# Altium PCB new_pir.PcbDoc
Units mm, origin at the board's own origin, x right, y up, seen from the top; angles counter-clockwise.
Board outline 122.94 x 94.36 mm, 2 copper layers (Top Layer, Bottom Layer); 60 components, 38 nets, 198 pads, 34 vias.
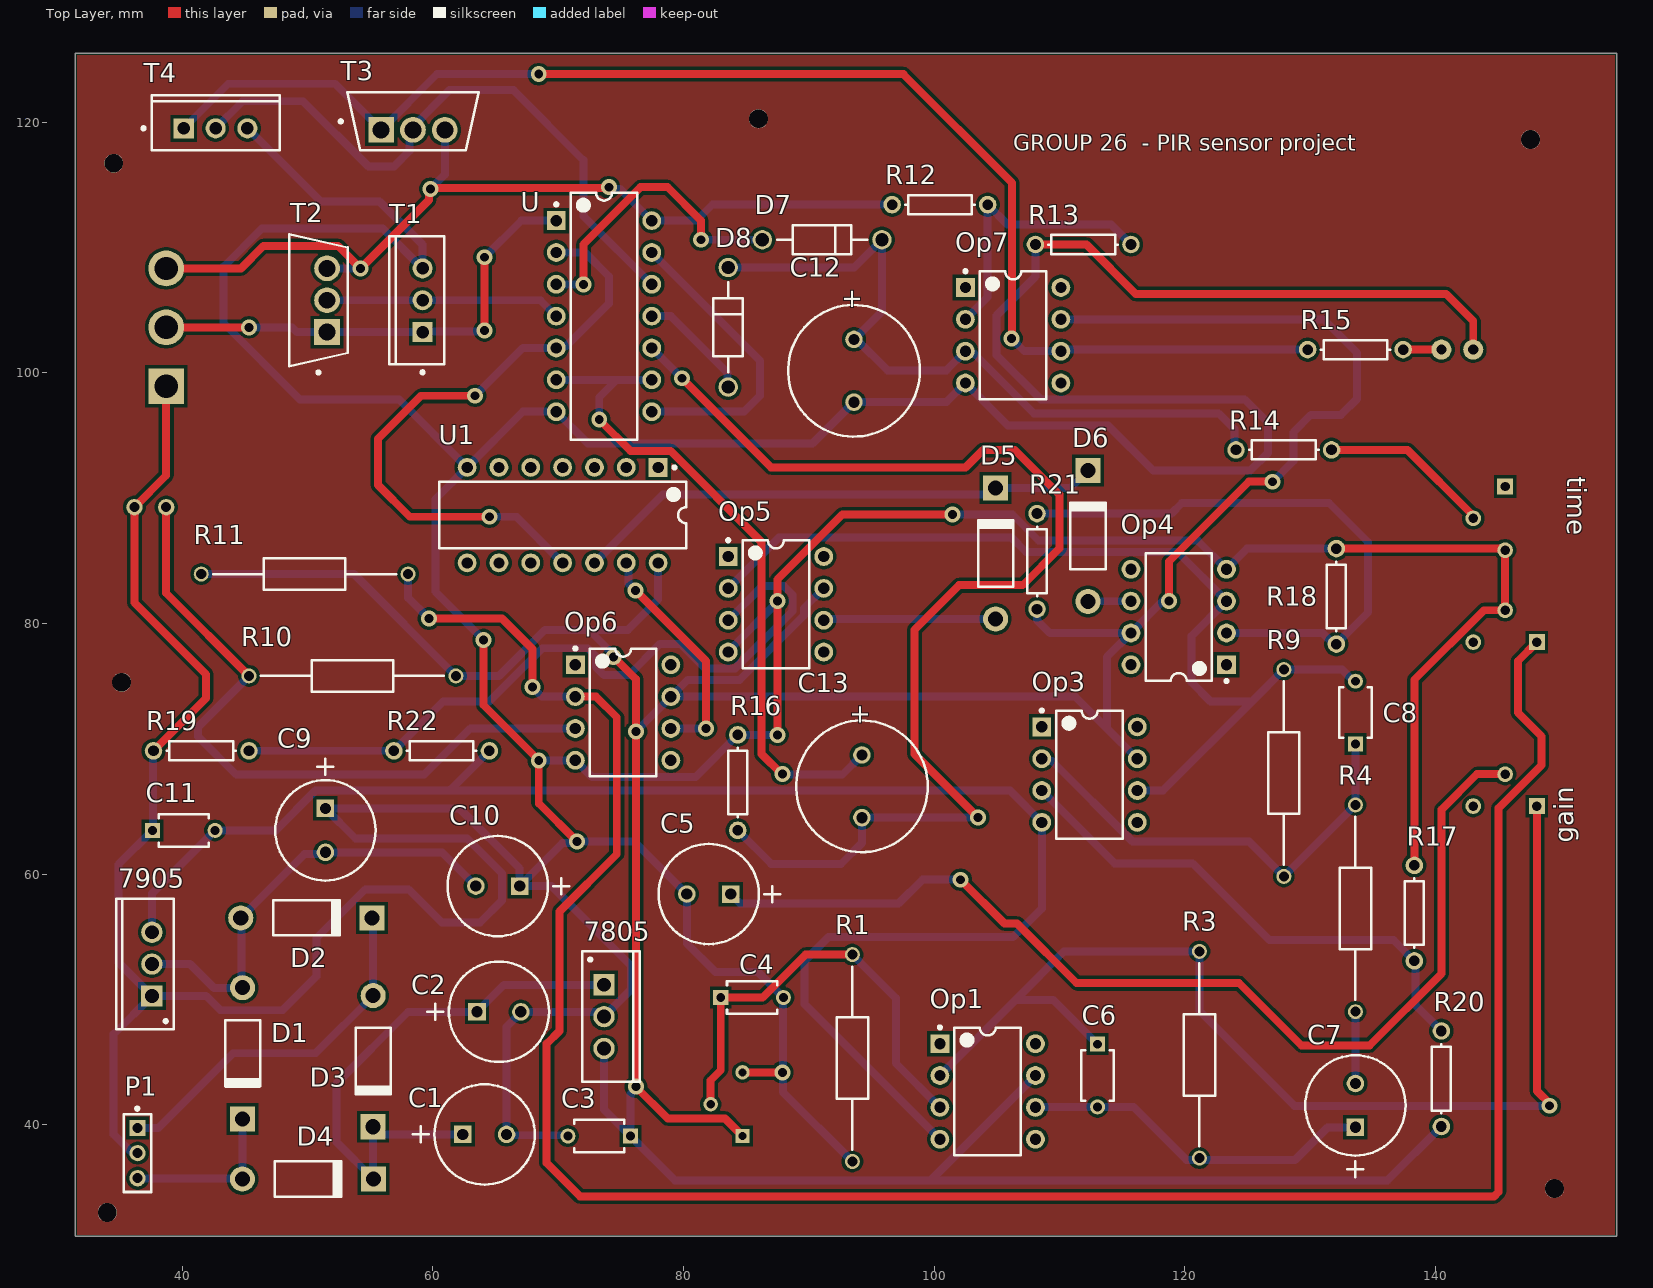
[diagram p0: Top Layer view]
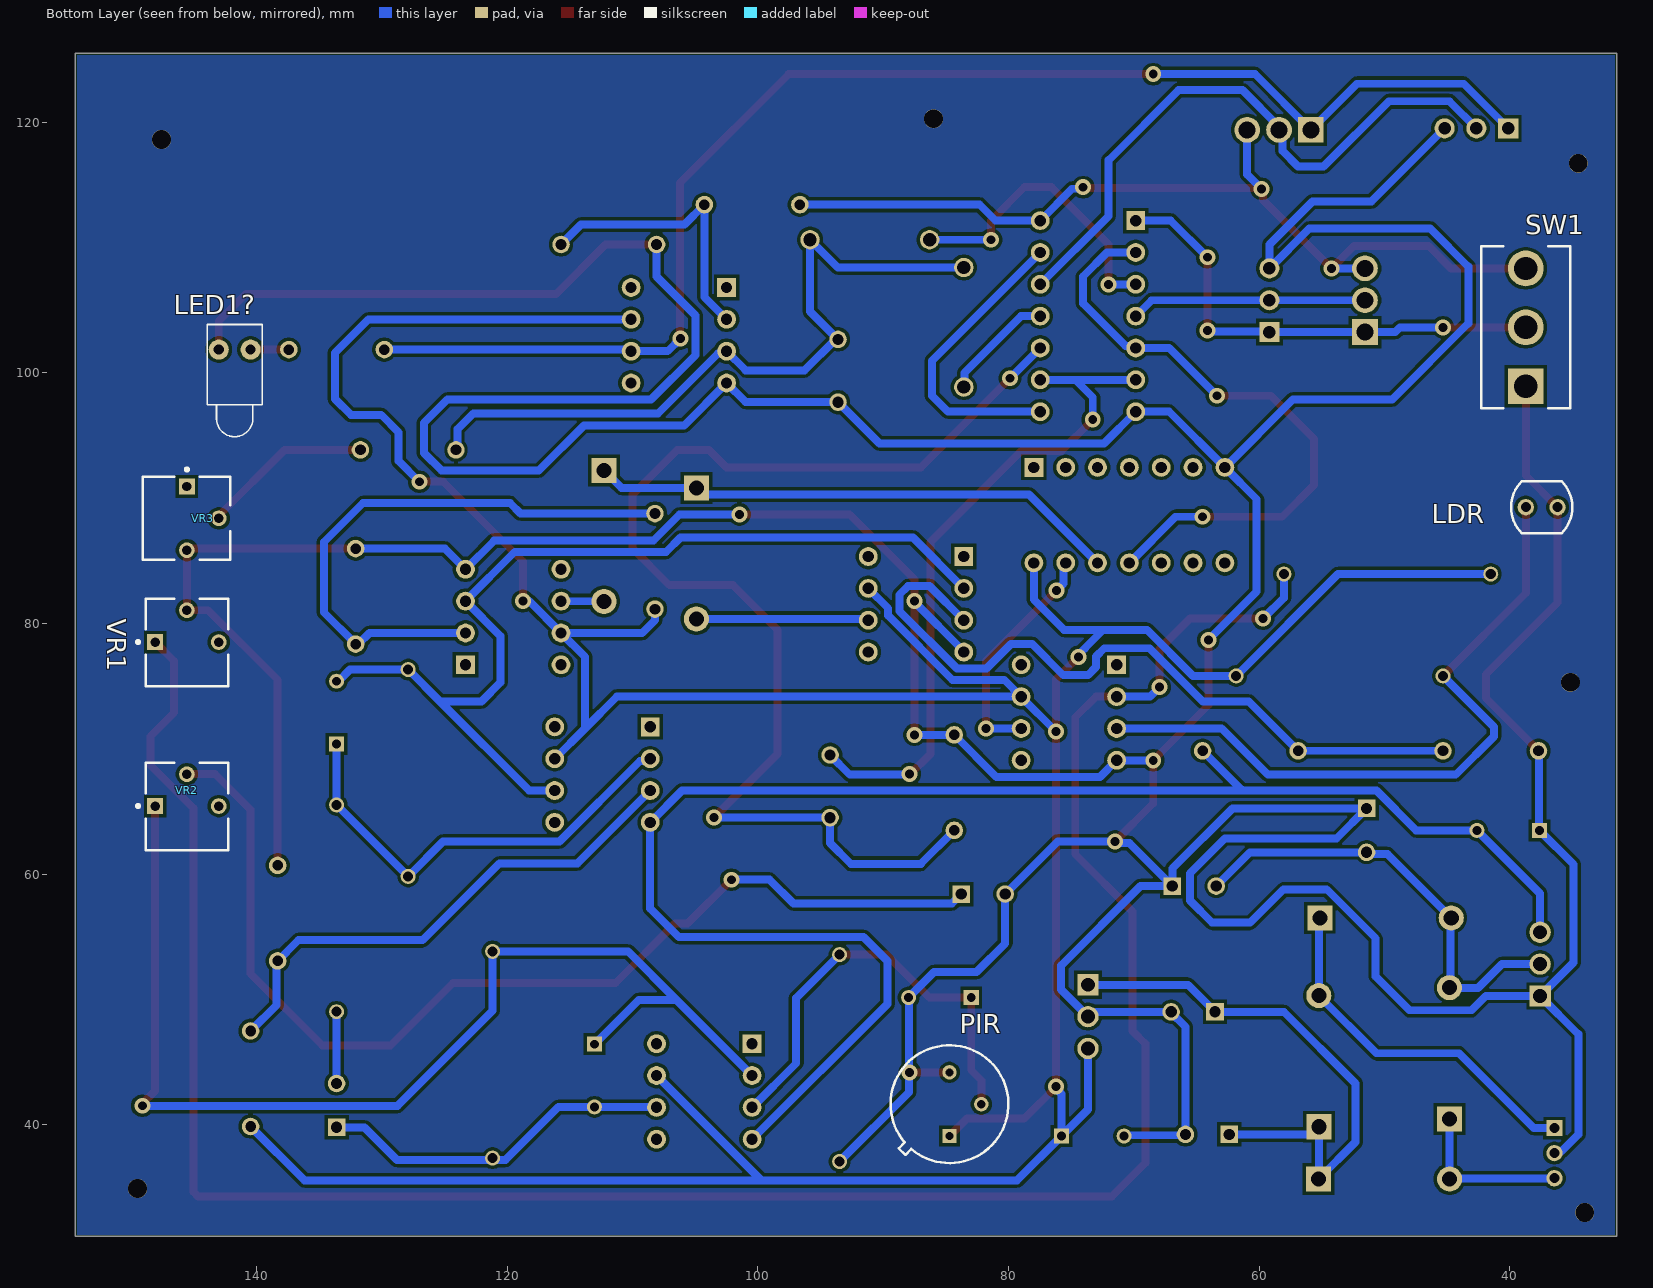
[diagram p1: Bottom Layer view, seen from below]

## Layer stack, top to bottom
Top Solder: solder mask 0.0102, Solder Resist, Dk 3.5
Top Layer: signal copper 0.0356
Dielectric 1: dielectric 0.32, FR-4, Dk 4.8
Bottom Layer: signal copper 0.0356
Bottom Solder: solder mask 0.0102, Solder Resist, Dk 3.5

## Board outline
31.496,31.115 154.432,31.115 154.432,125.476 31.496,125.476

## Design rules (kind name [scope] priority, off if disabled: settings)
Clearance [All] p1: gap=0.254 ignorepadtopadclearanceinfootprint=TRUE except(0: Arc-Hole Track-Hole SMDPad-Hole THPad-Hole Via-Hole Fill-Hole Poly-Hole Region-Hole Text-Hole)
PolygonConnect [All] p1: connectstyle=Relief reliefconductorwidth=0.254 reliefentries=4 polygonreliefangle="90 Angle" airgapwidth=0.254
RoutingVias [All] p1: holewidth=0.711 width=1.27 viastyle="Through Hole" minholewidth=0.711 minwidth=1.27 maxholewidth=0.711 maxwidth=1.27
SolderMaskExpansion [All] p1: expansion=0.102 istentingtop=FALSE
Width [All] p1: maxlimit=0.635 minlimit=0.254 preferedwidth=0.635 minimp=50.000000 maximp=50.000000 favimp=50.000000
30 further rules are at their usual default settings.

## Components (designator, comment, footprint, x,y, rotation, side; value= is the part's Value field where it differs from the comment)
7805 "L7805CV" TO220 73.66,48.641 r270 top
7905 "L7905CV" TO-220 37.592,52.832 r90 top
C1 "470uF 16V" CAPPR65-350-1150X800X1250 64.135,39.243 r0 top
C2 "330nF 16V" CAPPR65-350-1150X800X1250 65.278,49.022 r0 top
C3 "100nF" FP-K15H5-MFG 73.279,39.116 r180 top
C4 "100nF" FP-K15H5-MFG 85.471,50.165 r0 top
C5 "47uF 16V" CAPPR65-350-1150X800X1250 82.014,58.42 r180 top
C6 "10nF" FP-K15H5-MFG 113.03,43.942 r270 top
C7 "10uF 16V" CAPPR65-350-1150X800X1250 133.604,41.557 r90 top
C8 "10nF" FP-K15H5-MFG 133.604,72.898 r90 top
C9 "470uF 16V" CAPPR65-350-1150X800X1250 51.435,63.5 r270 top
C10 "330nF 16V" CAPPR65-350-1150X800X1250 65.179,59.055 r180 top
C11 "100nF" FP-K15H5-MFG 40.132,63.5 r0 top
C12 "ECA-1HHG471" PNSC-CAP-10x20-P2 93.599,100.163 r270 top
C13 "ECA-1HHG471" PNSC-CAP-10x20-P2 94.234,67.016 r270 top
D1 "Diode 1N4004" DO-41 44.831,45.72 r270 top
D2 "Diode 1N4004" DO-41 49.911,56.515 r0 top
D3 "Diode 1N4004" DO-41 55.245,45.085 r270 top
D4 "Diode 1N4004" DO-41 50.038,35.687 r0 top
D5 "Diode 1N4004" DO-41 104.902,85.598 r90 top
D6 "Diode 1N4004" DO-41 112.268,86.995 r90 top
D7 "1N4004" ONSC-AXIAL_LEAD-2-59-10_P 91.059,110.617 r180 top
D8 "1N4004" ONSC-AXIAL_LEAD-2-59-10_P 83.566,103.632 r270 top
LDR "VT90N1" EXCE-VT90N1 37.465,89.281 r0 bottom
LED1? "LED1" LED-1 141.732,101.854 r270 bottom
Op1 "LM741" P0008A 104.267,42.672 r0 top
Op3 "LM741" P0008A 112.395,67.945 r0 top
Op4 "LM741" P0008A 119.507,80.518 r180 top
Op5 "LM741" P0008A 87.376,81.534 r0 top
Op6 "LM741" P0008A 75.184,72.898 r0 top
Op7 "LM741" P0008A 106.299,102.997 r0 top
P1 "951103-8622-AR" FP-951103-8622-AR-MFG 36.449,37.751 r270 top
PIR "IRA-S210ST01" FP-IRA-S210ST01-MFG 84.709,41.656 r0 bottom
R1 "47kΩ" RESAD1650W60L650D250 93.472,53.584 r270 top
R3 "2MΩ" RESAD1650W60L650D250 121.158,53.848 r270 top
R4 "10kΩ" RESAD1650W60L650D250 133.604,49.032 r90 top
R9 "1MΩ" RESAD1650W60L650D250 127.889,59.827 r90 top
R10 "10kΩ" RESAD1650W60L650D250 45.339,75.819 r0 top
R11 "5kΩ" RESAD1650W60L650D250 58.029,83.947 r180 top
R12 "47kΩ" AXIAL-0.3 100.457,113.411 r0 top
R13 "47kΩ" AXIAL-0.3 111.887,110.236 r180 top
R14 "Res1" AXIAL-0.3 127.889,93.853 r180 top
R15 "Res1" AXIAL-0.3 133.604,101.854 r0 top
R16 "Res1" AXIAL-0.3 84.328,67.31 r90 top
R17 "47kΩ" AXIAL-0.3 138.303,56.896 r270 top
R18 "47kΩ" AXIAL-0.3 132.08,82.169 r270 top
R19 "47kΩ" AXIAL-0.3 41.529,69.85 r0 top
R20 "47kΩ" AXIAL-0.3 140.462,43.688 r270 top
R21 "47kΩ" AXIAL-0.3 108.204,84.963 r270 top
R22 "47kΩ" AXIAL-0.3 60.706,69.85 r0 top
SW1 "A101SYCB04" FP-A101SYCB04-MFG 38.735,103.632 r0 bottom
T1 "SPP21N50C3" INF-PG-TO220-3-1 59.182,105.791 r180 top
T2 "IRF9530PBF" FP-X15-0364-MFG 50.877,105.791 r180 top
T3 "IRF9530PBF" FP-X15-0364-MFG 58.42,120.065 r90 top
T4 "SPP21N50C3" INF-PG-TO220-3-1 42.672,119.507 r90 top
U "SN74AHCT08N" N0014A 73.66,104.521 r0 top
U1 "SN74AHCT08N" N0014A 70.358,88.646 r270 top
VR1 "3362P-1-103LF" BOUR-3362P 145.542,78.486 r180 bottom
VR2 "3362P-1-103LF" BOUR-3362P 145.542,65.405 r180 bottom
VR3 "3362P-1-103LF" BOUR-3362P 145.577,88.392 r270 bottom

## Footprints (in the part's own frame and the unit in brackets; to place one, negate y for a bottom-side part, rotate by r counter-clockwise, add the part's x,y. Pads: shape width x height; smd on the part's side, far side on the other; paste and mask are expansions set on the pad)
AXIAL-0.3 [mm] "Axial Device, Thru-Hole; 2 Leads; 0.3 in Pin Spacing"
  round 1.4 hole 0.85: 1(-3.81,0) 2(3.81,0)
  silkscreen extent -2.77,-0.76 2.77,0.76
BOUR-3362P [mm] "THD, 3-Leads, Body 6.6x6.99mm, Pitch 2.54mm"
  rect 1.25x1.25 hole 0.75: 1(-2.54,0.035)
  round 1.25 hole 0.75: 2(0,2.575) 3(2.54,0.035)
  silkscreen extent -4.03,-3.49 3.3,3.5, body extent -3.3,-3.49 3.3,3.49, height 4.95
CAPPR65-350-1150X800X1250 [mm] "THD, 2-Leads, Dia 8mm, Body 11.5mm"
  rect 1.4x1.4 hole 0.9: 1(-1.75,0)
  round 1.4 hole 0.9: 2(1.75,0)
  silkscreen extent -5.72,-4 4,4
DO-41 [mm] "Diode, Axial; Body 5.2 x 2.7 mm (LxDia. max), Lead Dia. 0.86 mm (max)"
  round 2 hole 1.2: 1(-5.23,0)
  rect 2x2 hole 1.2: 2(5.23,0)
  silkscreen extent -2.65,-1.4 2.75,1.4
EXCE-VT90N1 [mm] "THD, 2-Leads, Body Width 4.17mm (Max), Height 2.29mm"
  round 1.3 hole 0.8: 1(-1.27,0) 2(1.27,0)
  silkscreen extent -2.44,-2.08 2.44,2.08
FP-951103-8622-AR-MFG [mm]
  rect 1.3x1.3 hole 0.8 paste-1000 mask+0: 1(-2,0)
  round 1.3 hole 0.8 paste-1000 mask+0: 2(0,0) 3(2,0)
  silkscreen extent -3.67,-1.1 3.1,1.1, body extent -3.2,-1.2 3.2,1.2, height 0.25
FP-A101SYCB04-MFG [mil]
  rect 112.37x112.37 hole 73 paste-39370.1 mask+0: 1(0,185)
  round 112.37 hole 73 paste-39370.1 mask+0: 2(0,0) 3(0,-185)
  silkscreen extent -140,-255 140,255, body extent -135,-250 135,250, height 1201
FP-IRA-S210ST01-MFG [mm]
  rect 1.15x1.15 hole 0.65 paste-1000 mask+0: 1(0,2.54)
  round 1.15 hole 0.65 paste-1000 mask+0: 2(-2.54,0) 3(0,-2.54)
  silkscreen extent -4.7,-4.7 4.7,4.7, body extent -4.6,-4.6 4.6,4.6, height 4.9
FP-K15H5-MFG [mm]
  rect 1.2x1.2 hole 0.7 paste-1000 mask+0: 1(-2.5,0)
  round 1.2 hole 0.7 paste-1000 mask+0: 2(2.5,0)
  silkscreen extent -2,-1.3 2,1.3, body extent -3.2,-1.4 3.2,1.4, height 0.25
FP-X15-0364-MFG [mm]
  rect 2.05x2.05 hole 1.35 paste-1000 mask+0: 1(-0.685,2.54)
  round 2.05 hole 1.35 paste-1000 mask+0: 2(-0.685,0) 3(-0.685,-2.54)
  silkscreen extent -2.33,-5.26 2.33,5.88, body extent -2.42,-5.36 2.42,5.36, height 0.25
INF-PG-TO220-3-1 [mm] "FM, 3-Leads, Body 10x4.4mm, Pitch 2.54mm"
  rect 1.6x1.6 hole 1: 1(0,2.54)
  round 1.6 hole 1: 2(0,0) 3(0,-2.54)
  silkscreen extent -1.75,-5.1 2.65,5.87, body extent -1.75,-5.1 2.65,5.1, height 20.7
LED-1 [mm] "LED; 2 Leads"
  round 1.6 hole 0.8: 1(0,1.27) 2(0,-1.27)
  silkscreen extent -2,-2.2 6.95,2.2
N0014A [mm] "DIP, 14-Leads, Body 19.7x6.6mm, Pitch 2.54mm"
  rect 1.5x1.5 hole 0.9: 1(-3.81,7.62)
  round 1.5 hole 0.9: 2(-3.81,5.08) 3(-3.81,2.54) 4(-3.81,0) 5(-3.81,-2.54) 6(-3.81,-5.08) 7(-3.81,-7.62) 8(3.81,-7.62) 9(3.81,-5.08) 10(3.81,-2.54) 11(3.81,0) 12(3.81,2.54) 13(3.81,5.08) 14(3.81,7.62)
  silkscreen extent -3.93,-9.85 2.65,9.85, body extent -3.95,-9.85 3.95,9.85, height 5.08
ONSC-AXIAL_LEAD-2-59-10_P [mm] "AXIAL, 2-Leads, Diameter 2.35mm"
  round 1.55 hole 1.05: 1(-4.77,0) 2(4.77,0)
  silkscreen extent -3.6,-1.18 3.6,1.18
P0008A [mm] "DIP, 8-Leads, Body 10.15x6.6mm, Pitch 2.54mm"
  rect 1.5x1.5 hole 0.9: 1(-3.81,3.81)
  round 1.5 hole 0.9: 2(-3.81,1.27) 3(-3.81,-1.27) 4(-3.81,-3.81) 5(3.81,-3.81) 6(3.81,-1.27) 7(3.81,1.27) 8(3.81,3.81)
  silkscreen extent -3.93,-5.1 2.65,5.23, body extent -3.95,-5.07 3.95,5.07, height 5.08
PNSC-CAP-10x20-P2 [mm] "THD, 2-Leads, Dia 10.5mm, Body Length 22mm, Pin Spacing 5mm"
  round 1.4 hole 0.9: 1(-2.5,0) 2(2.5,0)
  silkscreen extent -5.25,-5.25 5.25,5.25, body extent -2.82,-0.32 2.83,0.32
RESAD1650W60L650D250 [mm]
  round 1.2 hole 0.8: 1(0,0) 2(16.5,0)
  silkscreen extent 0.95,-1.25 15.55,1.25, body extent -0.3,-1.25 16.8,1.25, height 2.49
TO220 [mm] "TO, Thru-Hole, Vertical, Heatsink Mounted; 3 In-Line Leads; Pitch 2.54 mm"
  rect 1.7x1.7 hole 1.1: 1(-2.54,0)
  round 1.7 hole 1.1: 2(0,0) 3(2.54,0)
  silkscreen extent -5.2,-1.75 5.2,2.85, body extent -5.25,-1.8 5.25,2.9, height 19.7
TO-220 [mm] "TO, Thru-Hole, Vertical, Heatsink Mounted; 3 In-Line Leads; Pitch 2.54 mm"
  rect 1.7x1.7 hole 1.1: 1(-2.54,0)
  round 1.7 hole 1.1: 2(0,0) 3(2.54,0)
  silkscreen extent -5.2,-1.75 5.2,2.85, body extent -5.25,-1.8 5.25,2.9, height 19.7

## Part data
7805: library part CMP-0244-00483-1, "Positive Voltage Regulator, 5V, 3-Pin TO-220"
7905: library part CMP-0244-00447-1, "Negative Voltage Regulator, -5V, 3-Pin TO-220"
C1 C2 C5 C7 C9 C10: library part CMP-1665-00042-2, "Aluminum Electrolytic Capacitor, 100 uF, +/- 20%, 50 V, -40 to 85 degC, 2-Pin THD, RoHS, Bulk"
C3 C4 C6 C8 C11: library part CMP-02417-000048-1, "CAP CER 0.1UF 50V X7R RADIAL"
C12 C13: library part CMP-2000-05308-1, "Aluminum Electrolytic Capacitor, 470 uF, +/- 20%, 50 V, -55 to 105 degC, 2-Pin THD, RoHS, Bulk"
D1 D2 D3 D4 D5 D6: "1 Amp General Purpose Rectifier"
D7 D8: library part CMP-0902-00115-1, "Standard Recovery Rectifier, 2-Pin Axial_Lead, Pb-Free, Bulk Bag"
LDR: library part CMP-2000-07406-1, "Photoconductive Resistor, 200 kOhm, 100 V, 80 mW, -40 to 75 degC, 2-Pin THD, RoHS"
LED1?: "Typical RED GaAs LED"
Op1 Op3 Op4 Op5 Op6 Op7: library part CMP-0055-00162-3, "Operational Amplifier, 8-pin MDIP, Pb-Free"
P1: library part CMP-05379-000003-1, "CONN HEADER VERT 3POS 2MM"
PIR: library part CMP-06150-000001-1, "MOTION SENSOR"
R1 R3 R4 R9 R10 R11 R12 R13 R17 R18 R19 R20 R21 R22: library part MRS25000C1002FC100, "Resistor"
R14 R15 R16: "Resistor"
SW1: library part CMP-03408-000017-1, "SWITCH TOGGLE SPDT 0.4VA 20V"
T1 T4: library part CMP-1164-00015-1, "N-Channel CoolMOS Power-Transistor, 500 V VDS, 21 A ID, -55 to 150 degC, PG-TO220-3-1, Tube, Green"
T2 T3: library part CMP-02550-000233-1, "MOSFET P-CH 100V 12A TO-220AB"
U U1: library part CMP-0777-00278-3, "Quadruple 2-Input Positive-AND Gates, N0014A, TUBE"
VR1 VR2 VR3: library part CMP-1747-00004-1, "Square Trimpot(R) Trimming Potentiometer, 10 KOhm, 300 V, -55 to 125 degC, 3-Pin THD, RoHS, Tube"

## Free pads (board coordinates)
  round 1.524 hole 1.5: 2(147.574,118.618) 3(85.979,120.269) 4(34.544,116.713) 5(35.179,75.311) 6(34.036,33.02) 7(149.479,34.925)

## Via types
v1: diameter 1.27, hole 0.711, Top Layer to Bottom Layer, 34 vias

## Nets (pads, with @x,y where several pads share a name; then routed paths per layer and width w, separated by ;. In a path a pad name is that pad's centre, name@x,y a point inside that pad or via, vN(x,y) a via of type N, cw(c..) or ccw(c..) an arc to the next point about the centre after c; other vN are vias at no path point)
+5: 7805.3 C3.1 Op1.7 Op3.7 Op4.7 Op5.7 Op6.7 Op7.7 PIR.1 R10.2 R11.2 R20.2 R21.2 U1.14 | length 319.1
  Top Layer w0.635: v1(74.422,77.343) 76.2,75.565 v1(76.2,71.374) v1(76.2,43.053) 78.744,40.509 83.316,40.509 PIR.1 ; v1(118.745,81.788) 118.745,84.963 125.095,91.313 v1(127,91.313)
  Bottom Layer w0.635: R11.2 53.711,83.947 R10.2 65.278,75.819 68.961,79.502 72.438,79.502 ; 7805.3 73.66,41.235 C3.1 ; v1(74.422,77.343) 74.422,77.515 73.914,78.023 73.914,78.026 72.438,79.502 ; v1(76.2,43.053) 76.2,42.881 75.779,42.46 C3.1 ; v1(76.2,71.374) Op6.7 ; U1.14 77.978,81.915 75.565,79.502 72.438,79.502 ; Op5.7 89.599,81.216 89.599,80.63 84.482,75.513 80.339,75.513 Op6.7 ; Op1.7 99.695,35.56 ; R21.2 108.204,80.264 109.22,79.248 Op4.7 ; Op7.7 131.064,104.267 133.731,101.6 133.731,97.917 132.461,96.647 130.048,96.647 128.651,95.25 128.651,92.964 v1(127,91.313) ; Op3.7 113.792,71.628 ; v1(118.745,81.788) 118.237,81.788 Op4.7 ; R20.2 136.144,35.56 99.695,35.56 ; C3.1 79.335,35.56 99.695,35.56 ; Op6.7 111.252,74.168 113.792,71.628 ; 113.792,71.628 113.792,77.343 Op4.7
+5v: R12.1 SW1.3 T2.3 T3.3 U.14 | length 72
  Top Layer w0.635: SW1.3 44.704,108.331 46.482,110.109 52.451,110.109 v1(54.229,108.331) 59.695,113.797 59.695,114.559 59.88,114.745 73.977,114.745 v1(74.041,114.808)
  Bottom Layer w0.635: T2.3 v1(54.229,108.331) ; v1(59.817,114.681) 60.96,115.824 T3.3 ; v1(74.041,114.808) 74.163,114.686 74.925,114.686 U.14 81.026,112.141 82.296,113.411 R12.1
-5: 7905.3 C11.2 Op1.4 Op3.4 R22.2 | length 129.1
  Bottom Layer w0.635: 7905.3 37.592,58.46 C11.2 47.477,63.5 50.652,66.675 106.045,66.675 Op3.4 108.585,57.277 106.299,54.991 91.567,54.991 89.662,53.086 89.662,49.657 Op1.4 ; 61.468,66.802 R22.2
GND: 7805.2 7905.1 C1.2 C2.2 C3.2 C4.2 C5.2 C9.1 C10.1 C11.1 C12.2 LDR.1 LED1?.2 Op4.4 Op5.4 Op6.4 Op7.4 P1.2 PIR.3 R1.2 R13.2 R16.2 R17.1 R18.1 R19.1 SW1.1 T1.3 T4.3 U1.7 U.7 VR1.2 VR3.3 | length 613.2
  Top Layer w0.635: R19.1 41.91,74.041 41.91,75.946 36.195,81.661 LDR.1 38.735,91.821 SW1.1 ; v1(64.057,78.691) 64.057,73.484 v1(68.453,69.088) 68.453,65.659 v1(71.501,62.611) ; Op6.4 Op6.4@71.438,69.025 ; PIR.3 v1(87.884,44.196) ; v1(87.503,71.12) v1(87.503,81.788) 87.503,83.53 92.684,88.711 101.469,88.711 v1(101.471,88.709) ; R13.2 112.141,110.236 116.078,106.299 140.843,106.299 143.002,104.14 LED1?.2 ; R18.1 144.98,85.979 144.989,85.97 145.424,85.97 VR3.3 VR1.2 143.85,81.061 138.303,75.514 R17.1
  Bottom Layer w0.635: P1.2 36.322,37.878 35.909,37.878 34.544,39.243 34.544,47.244 7905.1 ; R19.1 37.675,69.806 37.675,63.544 C11.1 34.925,60.793 34.925,52.959 7905.1 ; T4.3 51.054,113.665 55.753,113.665 59.182,110.236 T1.3 56.007,111.506 46.355,111.506 43.316,108.467 43.316,103.949 49.388,97.877 57.317,97.877 U1.7 ; v1(64.057,78.691) 60.198,82.55 60.198,89.916 U1.7 ; v1(68.453,69.088) Op6.4 72.696,67.766 80.974,67.766 R16.2 v1(87.503,71.12) ; C3.2 70.715,39.179 65.948,39.179 C1.2 65.885,47.828 67.028,48.971 C2.2 72.991,49.022 73.372,48.641 7805.2 75.819,50.8 75.819,52.705 69.469,59.055 C10.1 ; Op5.4 83.566,77.787 87.503,81.724 v1(87.503,81.788) ; R1.2 87.947,42.608 87.947,44.133 v1(87.884,44.196) 87.927,44.239 87.927,50.081 87.991,50.145 C4.2 85.939,52.197 82.55,52.197 80.264,54.483 C5.2 76.073,62.611 v1(71.501,62.611) 71.379,62.489 70.363,62.489 C10.1 ; v1(101.471,88.709) 101.473,88.711 106.234,88.711 108.333,86.612 121.033,86.612 Op4.4 124.968,85.979 R18.1 ; R13.2 108.077,107.692 104.965,104.58 104.965,101.41 108.51,97.865 124.766,97.865 126.619,96.012 126.619,93.599 125.222,92.202 117.475,92.202 113.876,95.801 105.875,95.801 Op7.4 100.965,97.663 C12.2 90.297,94.361 72.39,94.361 U.7 67.183,96.901 U1.7 ; 7905.1 41.923,50.292 43.066,49.149 48.015,49.149 50.706,51.84 50.706,54.888 54.619,58.801 58.064,58.801 60.731,56.134 63.754,56.134 65.532,57.912 65.532,60.071 62.738,62.865 53.82,62.865 C9.1 62.131,65.25 66.929,60.452 C10.1
Net7805_1: 7805.1 C1.1 C2.1 D3.2 D4.2 | length 45
  Bottom Layer w0.381: D4.2@55.245,35.71 D4.2
  Bottom Layer w0.635: C1.1 55.857,39.243 D3.2 55.245,35.71 52.324,38.631 52.324,43.307 58.039,49.022 C2.1 65.687,51.181 7805.1
Net7905_2: 7905.2 C9.2 C10.2 D1.1 D2.1 | length 35.7
  Bottom Layer w0.381: D2.1 D2.1@44.756,56.44 ; D1.1@44.756,51.025 D1.1
  Bottom Layer w0.635: 7905.2 40.64,52.832 42.545,50.927 44.808,50.927 D1.1 ; D2.1 49.782,61.616 51.302,61.616 C9.2 60.734,61.75 C10.2 ; D1.1@44.756,51.025 D2.1@44.756,56.44
NetC4_1: C4.1 Op1.3 PIR.2 R1.1 | length 36
  Top Layer w0.635: PIR.2 82.169,43.561 82.971,44.363 C4.1 86.314,50.165 89.733,53.584 R1.1
  Bottom Layer w0.635: R1.1@93.319,53.584 R1.1 96.936,50.12 96.936,44.923 Op1.3
NetC5_1: C5.1 VR2.2 | length 85
  Top Layer w0.635: v1(102.108,59.563) 105.598,56.073 106.603,56.073 111.368,51.308 124.333,51.308 129.286,46.355 134.747,46.355 140.462,52.07 140.462,65.151 143.291,67.98 VR2.2
  Bottom Layer w0.635: C5.1 84.526,57.658 97.155,57.658 99.06,59.563 v1(102.108,59.563)
NetC6_1: C6.1 Op1.2 R3.1 VR2.1 | length 93
  Top Layer w0.635: VR2.1 148.082,42.717 149.098,41.701 v1(149.098,41.529)
  Bottom Layer w0.635: Op1.2 106.489,49.974 ; C6.1 109.498,49.974 106.489,49.974 ; v1(149.098,41.529) 128.738,41.529 121.158,49.109 R3.1 110.363,53.848 106.489,49.974
NetC6_2: C6.2 C7.1 Op1.6 R3.2 | length 28.4
  Bottom Layer w0.635: Op1.6 108.097,41.422 113.01,41.422 C6.2 115.911,41.442 120.142,37.211 121.158,37.211 128.778,37.211 131.374,39.807 C7.1
NetC7_2: C7.2 R4.1 | length 5.7
  Bottom Layer w0.635: C7.2 R4.1
NetC8_1: C8.1 Op3.2 R4.2 R9.1 | length 36.1
  Bottom Layer w0.635: Op3.2 108.751,69.049 109.386,69.049 115.824,62.611 125.105,62.611 R9.1 R4.2@133.599,65.537 ; R4.2 C8.1
NetC8_2: C8.2 Op3.6 Op4.3 Op5.2 R9.2 | length 78.4
  Bottom Layer w0.635: Op5.2 87.63,86.868 106.165,86.868 107.309,85.723 119.382,85.723 Op4.3 120.523,78.994 120.523,75.311 122.047,73.787 125.349,73.787 ; Op3.6 118.237,66.675 125.349,73.787 ; C8.2 133.451,75.398 132.522,76.327 R9.2 125.349,73.787
NetC12_1: C12.1 D7.1 D8.1 Op7.3 R14.2 | length 58.3
  Bottom Layer w0.635: D8.1 93.614,108.402 D7.1 95.829,104.893 C12.1 93.806,102.663 96.266,100.203 100.965,100.203 Op7.3 102.655,101.561 103.163,101.561 107.95,96.774 122.691,96.774 123.96,95.506 123.96,93.972 R14.2
NetC13_1: C13.1 U.6 U.9 | length 54.8
  Top Layer w0.635: v1(73.279,96.266) 75.767,93.778 78.965,93.778 86.233,86.509 86.233,69.596 87.82,68.008 v1(87.884,68.008) ; C13.1@94.027,69.516 C13.1
  Bottom Layer w0.635: U.6 74.676,99.441 ; v1(73.279,96.266) 73.279,98.044 74.676,99.441 ; U.9 74.676,99.441 ; v1(87.884,68.008) 87.947,67.945 92.663,67.945 C13.1
NetC13_2: C13.2 R16.1 U.10 | length 97.2
  Top Layer w0.635: v1(79.883,99.568) 86.995,92.456 102.489,92.456 103.886,93.853 106.426,93.853 109.982,90.297 109.982,85.979 107.061,83.058 101.981,83.058 98.425,79.502 98.425,69.596 v1(103.505,64.516)
  Bottom Layer w0.635: U.10 v1(79.883,99.568) ; R16.1 86.995,60.833 92.583,60.833 94.234,62.484 C13.2 v1(103.505,64.516)
NetD1_2: D1.2 D4.1 P1.3 | length 13.2
  Bottom Layer w0.381: P1.3 P1.3@36.481,35.719 ; D4.1@44.776,35.719 D4.1 ; D1.2@44.808,40.467 D1.2
  Bottom Layer w0.635: P1.3@36.481,35.719 D4.1@44.776,35.719 ; D4.1 D1.2@44.808,40.467
NetD2_2: D2.2 D3.1 P1.1 | length 29.4
  Bottom Layer w0.381: D2.2 D2.2@55.245,56.411
  Bottom Layer w0.635: P1.1 38.1,39.751 44.069,45.72 50.65,45.72 D3.1 D2.2@55.245,56.411
NetD5_1: D5.1 Op5.6 | length 13.7
  Bottom Layer w0.635: Op5.6@91.186,80.38 104.89,80.38 D5.1
NetD5_2: D5.2 D6.2 U1.12 | length 42.4
  Bottom Layer w0.635: U1.12 78.359,90.297 104.371,90.297 D5.2 110.871,90.828 D6.2
NetD6_1: D6.1 Op4.6 | length 3.4
  Bottom Layer w0.635: D6.1 112.28,81.777 115.686,81.777 Op4.6
NetD7_2: D7.2 U.3 | length 24.1
  Top Layer w0.635: v1(72.009,107.061) 72.009,110.236 76.581,114.808 78.74,114.808 81.407,112.141 v1(81.407,110.617)
  Bottom Layer w0.635: U.3 v1(72.009,107.061) ; v1(81.407,110.617) D7.2
NetD8_2: D8.2 U.11 | length 9.1
  Bottom Layer w0.635: U.11 78.994,104.521 83.523,99.992 83.523,98.905 D8.2
NetLDR_2: LDR.2 Op6.3 R10.1 | length 55.6
  Top Layer w0.635: LDR.2 38.735,82.423 R10.1
  Bottom Layer w0.635: R10.1 41.275,71.755 41.275,70.993 44.323,67.945 59.309,67.945 62.992,71.628 Op6.3
NetLED1?_1: LED1?.1 R15.2 | length 3.3
  Top Layer w0.635: R15.2 LED1?.1
  Bottom Layer w0.635: LED1?.1@140.201,101.854 LED1?.1
NetOp3_3: Op3.3 R17.2 R20.1 | length 41.8
  Bottom Layer w0.635: Op3.3 114.398,60.862 120.621,60.862 126.746,54.737 136.652,54.737 138.407,52.982 138.407,49.553 R20.1
NetOp4_2: Op4.2 R18.2 R21.1 | length 46.4
  Bottom Layer w0.635: R21.1 118.922,88.773 119.748,89.599 131.509,89.599 134.62,86.487 134.62,80.899 R18.2 131.873,78.359 130.984,79.248 Op4.2
NetOp6_2: Op6.2 R11.1 VR1.1 | length 186.1
  Top Layer w0.635: v1(59.69,80.391) 65.532,80.391 67.945,77.978 v1(67.945,74.93) ; Op6.2 73.025,74.168 74.676,72.517 74.676,61.595 70.104,57.023 70.104,47.498 69.088,46.482 69.088,36.957 71.755,34.29 144.662,34.29 145.034,34.662 145.034,65.278 148.463,68.707 148.463,70.993 146.558,72.898 146.558,76.997 VR1.1
  Bottom Layer w0.635: R11.1 58.029,82.052 v1(59.69,80.391) ; v1(67.945,74.93) 68.707,74.168 Op6.2
NetOp6_6: Op6.6 U1.13 | length 18.6
  Top Layer w0.635: v1(76.164,82.641) 81.788,77.017 v1(81.788,71.628)
  Bottom Layer w0.635: U1.13 75.604,84.67 75.604,83.202 v1(76.164,82.641) ; Op6.6 v1(81.788,71.628)
NetOp7_2: Op7.2 R12.2 R13.1 | length 22.8
  Bottom Layer w0.635: Op7.2 104.267,106.045 R12.2 105.855,111.823 114.11,111.823 R13.1 ; R13.1@115.824,110.236 R13.1@116.031,110.236
NetOp7_6: Op7.6 R15.1 T3.1 T4.1 | length 111
  Top Layer w0.635: v1(68.453,123.825) 97.539,123.825 106.206,115.158 106.206,102.777 v1(106.172,102.743)
  Bottom Layer w0.635: T4.1 43.688,123.063 52.197,123.063 T3.1 60.325,123.825 v1(68.453,123.825) ; v1(106.172,102.743) 107.188,101.727 Op7.6 110.236,101.854 R15.1
NetR14_1: R14.1 VR3.2 | length 13.4
  Top Layer w0.635: R14.1 137.76,93.853 VR3.2@142.967,88.646
NetSW1_2: SW1.2 T1.1 T2.1 U.1 | length 38.5
  Top Layer w0.635: SW1.2 v1(45.339,103.632) ; v1(64.135,103.378) v1(64.135,109.22)
  Bottom Layer w0.635: v1@45.339,103.48 v1(45.339,103.632) 48.768,103.632 49.149,103.251 T2.1 T1.1 59.245,103.314 64.072,103.314 v1(64.135,103.378) ; v1(64.135,109.22) 67.056,112.141 U.1
NetT1_2: T1.2 T2.2 U.4 | length 18.8
  Bottom Layer w0.635: T2.2 T1.2 68.58,105.791 U.4
NetT3_2: T3.2 T4.2 U.12 | length 50.4
  Bottom Layer w0.635: T4.2 44.831,121.666 49.657,121.666 54.864,116.459 56.896,116.459 58.149,117.712 58.149,119.109 T3.2 58.42,119.634 61.341,122.555 66.421,122.555 72.009,116.967 72.009,112.522 U.12
NetU1_11: U1.11 U.2 U.5 | length 51
  Top Layer w0.635: v1(63.373,98.171) 59.055,98.171 55.626,94.742 55.626,91.059 58.166,88.519 v1(64.516,88.519)
  Bottom Layer w0.635: v1(63.373,98.171) 67.183,101.981 U.5 70.016,102.147 70.651,102.147 74.041,105.537 74.041,107.696 72.136,109.601 U.2 ; v1(64.516,88.519) 66.675,88.519 U1.11
NetU_8: U.8 U.13 | length 24.2
  Bottom Layer w0.635: U.8 84.836,96.901 86.106,98.171 86.106,100.965 U.13
Vl: Op5.3 R19.2 R22.1 | length 59.7
  Bottom Layer w0.635: R19.2 R22.1 60.833,73.787 64.503,73.787 68.746,78.03 72.361,78.03 73.025,77.365 73.025,76.526 73.668,75.882 75.629,75.882 78.105,78.359 79.801,78.359 81.758,76.402 84.113,76.402 88.709,80.999 88.709,82.288 88.003,82.995 86.296,82.995 Op5.3
pads on no net: Op1.1 Op1.5 Op1.8 Op3.1 Op3.5 Op3.8 Op4.1 Op4.5 Op4.8 Op5.1 Op5.5 Op5.8 Op6.1 Op6.5 Op6.8 Op7.1 Op7.5 Op7.8 U1.1 U1.2 U1.3 U1.4 U1.5 U1.6 U1.8 U1.9 U1.10 VR1.3 VR2.3 VR3.1

## Polygon pours and split planes (outlines as drawn)
no net on Bottom Layer "NONET_L02_P000" (solid, pour order 0): 31.623,125.349 154.305,125.349 154.305,31.242 31.623,31.242
no net on Top Layer "NONET_L01_P001" (solid, pour order 1): 31.623,31.242 154.305,31.242 154.305,125.349 31.623,125.349

## Silkscreen, mask and mechanical layers (free items; w line width, h text height)
Top Overlay:
  text "GROUP 26  - PIR sensor project" at 106.299,117.729 h1.27
  text "time" at 150.491,91.698 h1.5 r270
  text "gain" at 150.965,62.53 h1.5 r90
Mechanical 1:
  the board outline again, w0.254

## Text inside footprints (layer, text, board x,y; h text height)
C12: Top Overlay "+" at 92.837,106.767 h1.5 r270
C13: Top Overlay "+" at 93.472,73.62 h1.5 r270